# Altium PCB 集成晶闸管.PcbDoc
Units mil, origin at the board's own origin, x right, y up, seen from the top; angles counter-clockwise.
Board outline 5905.51 x 7086.61 mil, 4 copper layers (Top Layer, Internal Plane 1, Internal Plane 2, Bottom Layer); 20 components, 19 nets, 84 pads, 0 vias.
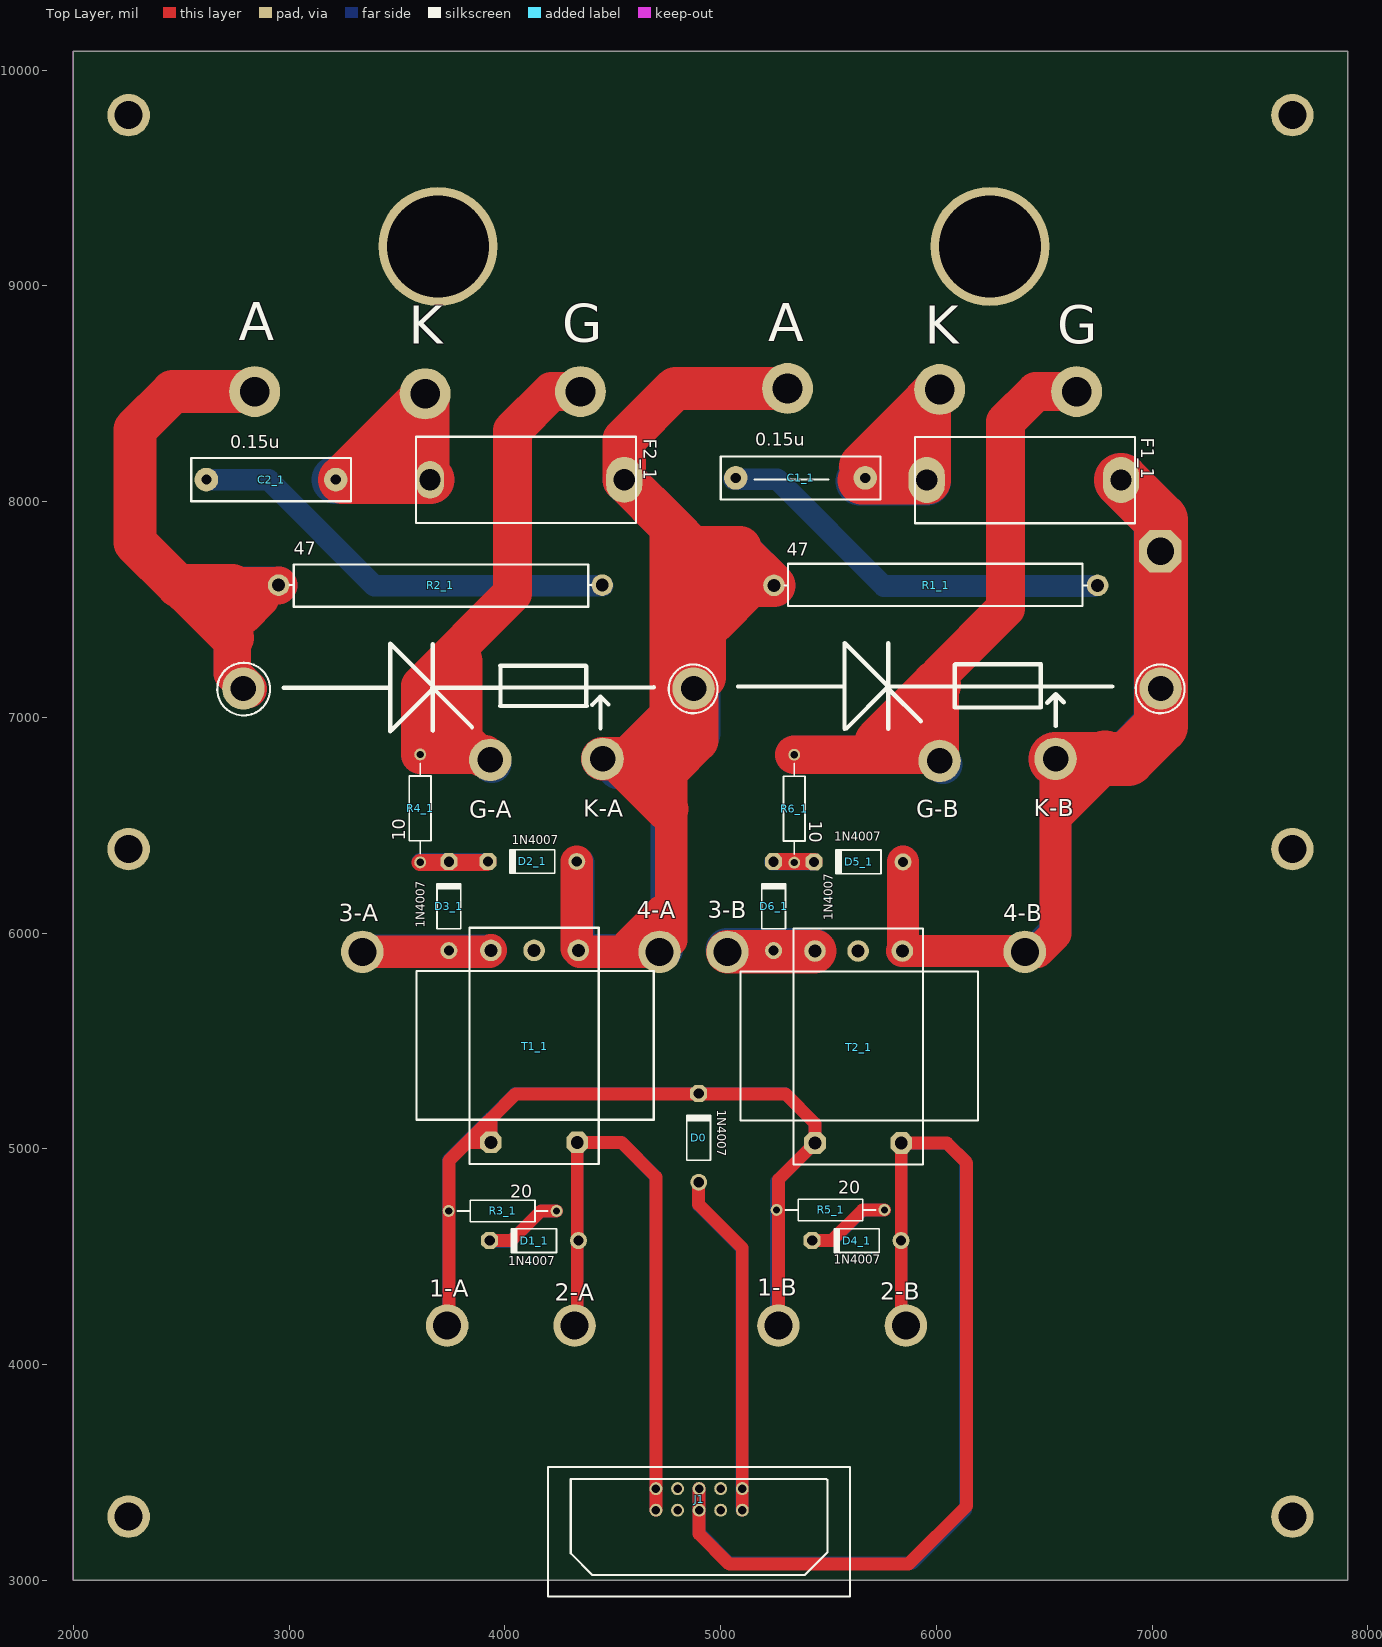
[diagram p0: Top Layer view]
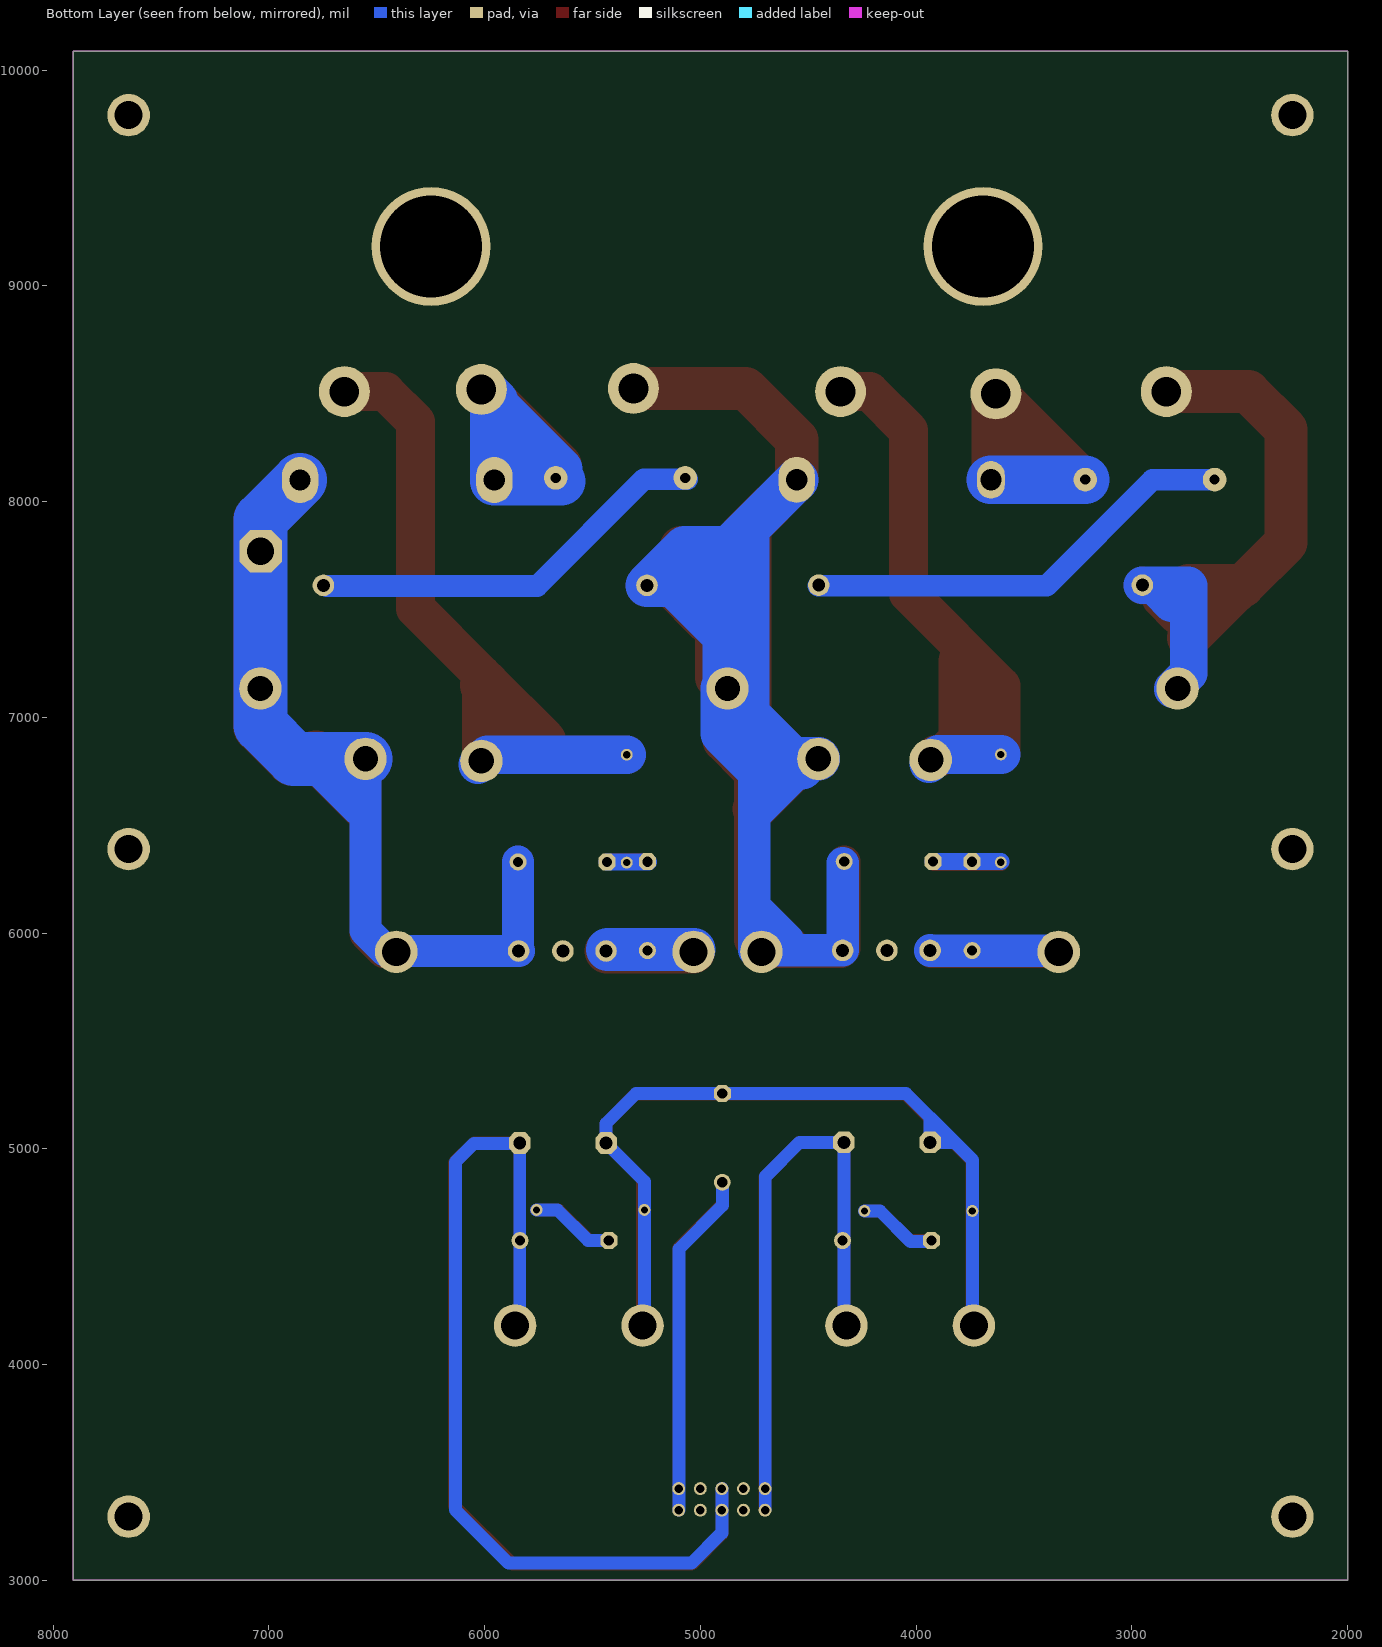
[diagram p1: Bottom Layer view, seen from below]
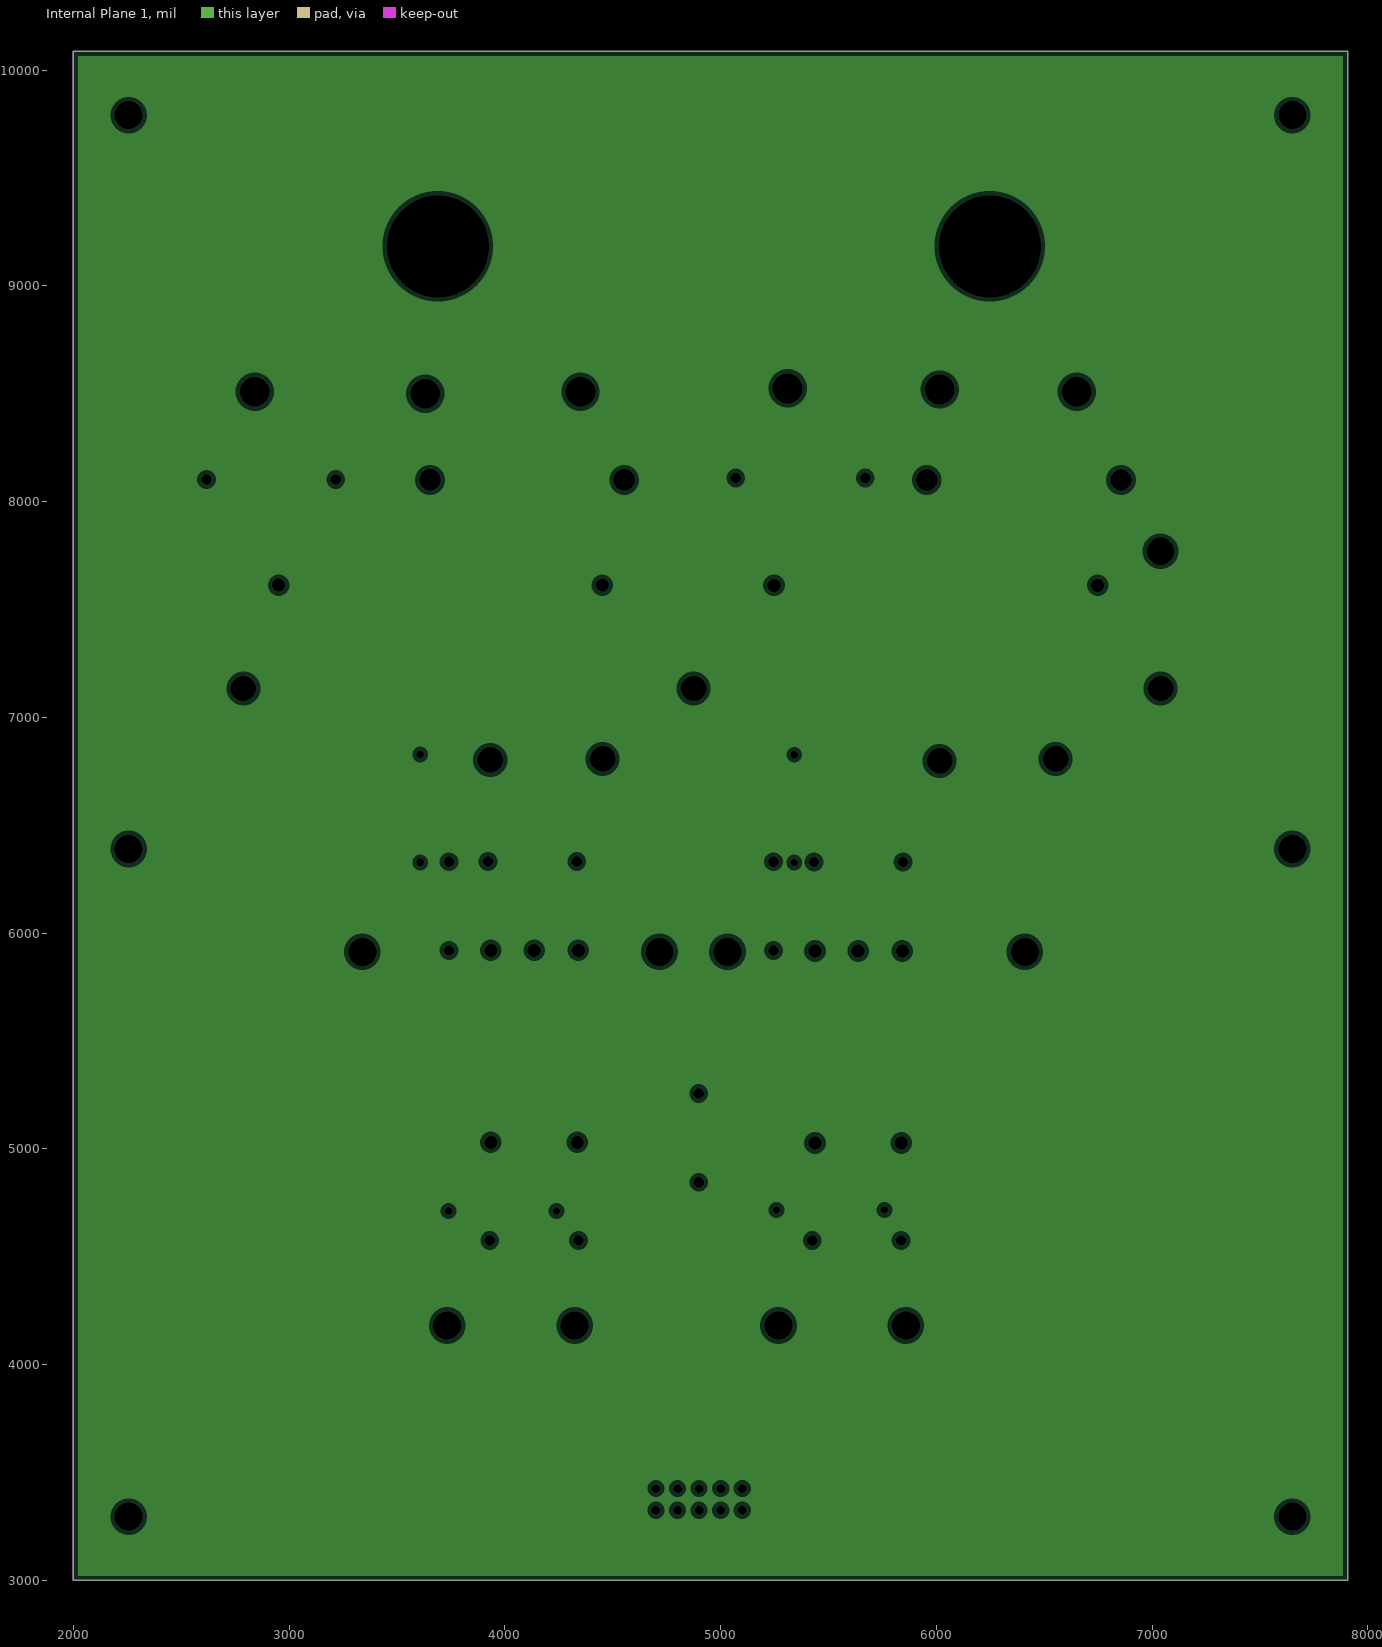
[diagram p2: Internal Plane 1, clearances drawn from the general rule]
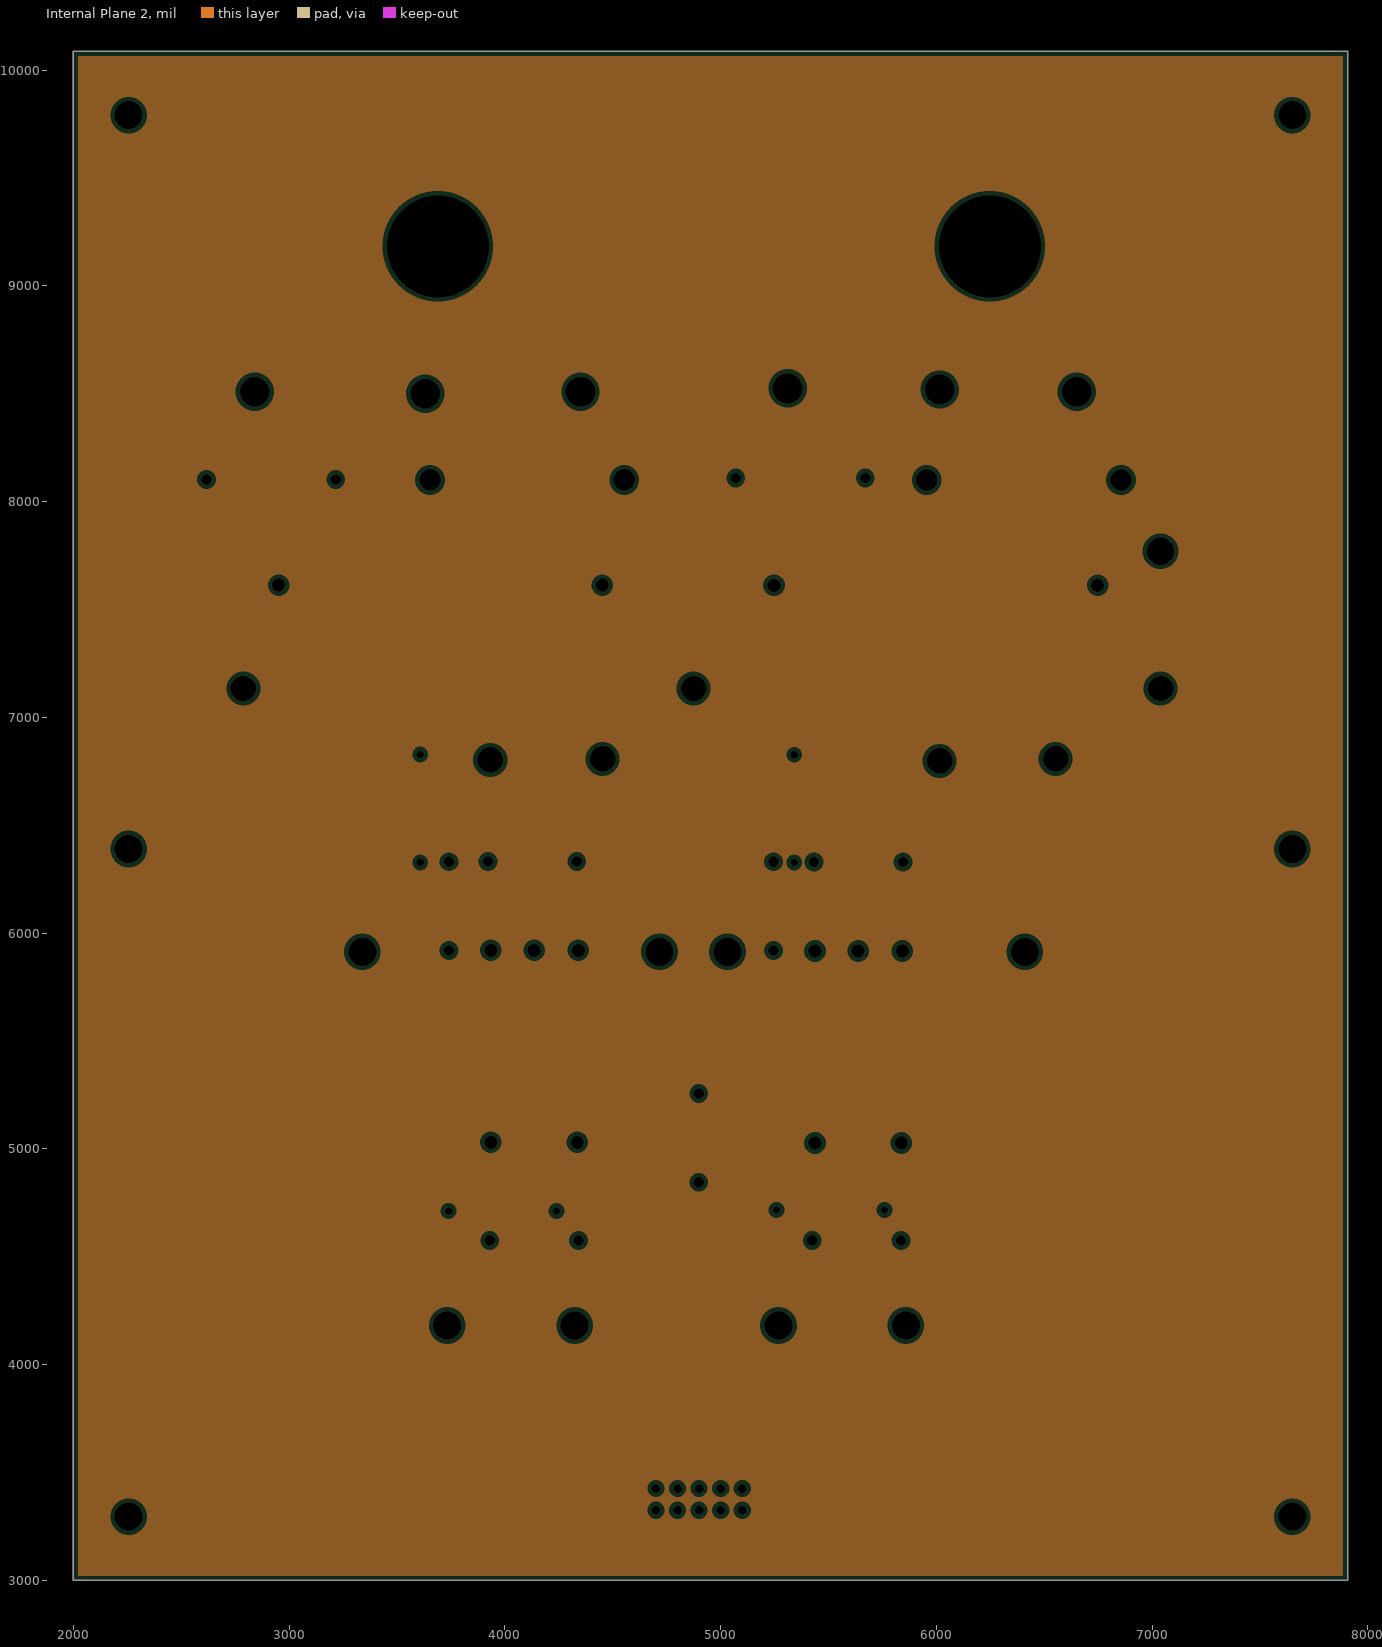
[diagram p3: Internal Plane 2, clearances drawn from the general rule]

## Layer stack, top to bottom
Top Layer: signal copper 1.4
Dielectric: dielectric 12.6, FR-4, Dk 4.8
Internal Plane 1: plane copper 1.4
Dielectric: dielectric 12.6, FR-4, Dk 4.8
Internal Plane 2: plane copper 1.4
Dielectric: dielectric 12.6, FR-4, Dk 4.8
Bottom Layer: signal copper 1.4

## Board outline
2000,3000 7905.51,3000 7905.51,10086.61 2000,10086.61

## Design rules (kind name [scope] priority, off if disabled: settings)
Clearance Clearance_1 [All] p1: gap=10
Clearance [All] p2: gap=7.87
PlaneClearance [All] p1: clearance=20
PlaneConnect [All] p1: planeconnectstyle=Relief reliefexpansion=20 reliefentries=4 reliefconductorwidth=10 reliefairgap=10
PolygonConnect [All] p1: connectstyle=Relief reliefconductorwidth=10 reliefentries=4 polygonreliefangle="90 Angle" airgapwidth=10
RoutingVias [All] p1: holewidth=23.62 width=39.37 viastyle="Through Hole" minholewidth=28 minwidth=50 maxholewidth=28 maxwidth=50
SolderMaskExpansion [All] p1: expansion=4
Width [All] p1: maxlimit=300 minlimit=10 preferedwidth=100 minimp=50.000000 maximp=50.000000 favimp=50.000000
26 further rules are at their usual default settings.

## Components (designator, comment, footprint, x,y, rotation, side; value= is the part's Value field where it differs from the comment)
C1_1 "0.15u" CAP_K 5670,8110 r180 top
C2_1 "0.15u" CAP_K 3216,8102 r180 top
D0 "1N4007" DO-41 4898,5051 r90 top
D1_1 "1N4007" DO-41 4135,4575 r180 top
D2_1 "1N4007" DO-41 4127,6332 r180 top
D3_1 "1N4007" DO-41 3740,6125 r90 top
D4_1 "1N4007" DO-41 5630,4575 r180 top
D5_1 "1N4007" DO-41 5639,6330 r180 top
D6_1 "1N4007" DO-41 5245,6125 r90 top
F1_1 "380V/15A" FUSE#1 6555,8200 r180 top
F2_1 "380V/15A" FUSE#2 3953,8001 r0 top
J1 "CON" PLC_IN 5100,3425 r90 top
R1_1 "47" RES_K 6747,7612 r180 top
R2_1 "47" RES_K 2951,7613 r0 top
R3_1 "20" AXIAL-0.5 3989,4712 r180 top
R4_1 "10" AXIAL-0.5 3607,6578 r270 top
R5_1 "20" AXIAL-0.5 5509,4717 r180 top
R6_1 "10" AXIAL-0.5 5341,6577 r270 top
T1_1 "P_trans" P_TRANS 3935,5030 r90 top
T2_1 "P_trans" P_TRANS 5437,5027 r90 top

## Footprints (in the part's own frame and the unit in brackets; to place one, negate y for a bottom-side part, rotate by r counter-clockwise, add the part's x,y. Pads: shape width x height; smd on the part's side, far side on the other; paste and mask are expansions set on the pad)
AXIAL-0.5 [mm]
  round 1.4 hole 0.85: 1(-6.35,0) 2(6.35,0)
  silkscreen extent -5.33,-1.27 5.33,1.27
CAP_K [mm]
  round 2.778 hole 1.2: 1(0,0) 2(15.24,0)
  silkscreen extent -1.78,-2.54 17.02,2.54
DO-41 [mm]
  round 2 hole 1.2: 1(-5.23,0)
  oct 2x2 hole 1.2: 2(5.23,0)
  silkscreen extent -2.65,-1.41 2.75,1.4
FUSE#1 [mm]
  oval 4.27x5.413 hole 2.5: 1(-7.62,2.54) 2(15.24,2.54)
  silkscreen extent -9.27,-2.54 16.64,7.62
FUSE#2 [mm]
  oval 3.27x4.413 hole 2.5: 1(-7.62,2.54)
  oval 4.27x5.413 hole 2.5: 2(15.24,2.54)
  silkscreen extent -9.27,-2.54 16.64,7.62
P_TRANS [mil]
  oct 100x100 hole 60: 1(0,0) 2(0,-400)
  round 100 hole 60: 3(890,0) 4(890,-405) ""(890,-200)
  silkscreen extent -100,-755 995,345
PLC_IN [mil]
  round 60 hole 39.37: 1(0,0) 2(-100,0) 3(0,100) 4(-100,100) 5(0,200) 6(-100,200) 7(0,300) 8(-100,300) 9(0,400) 10(-100,400)
  silkscreen extent -500,-500 100,900
RES_K [mil]
  round 100 hole 60: 1(0,0) 2(1500,0)
  silkscreen extent 50,-100 1450,95

## Free pads (board coordinates)
  round 196.85 hole 129.92: 0(2255.91,6389.76) 0(7649.61,3295.28) 1(2255.91,3295.28) 1(7649.61,6389.76) 2(2255.91,9791.34) 2(3732.28,4181.1) 3(4322.83,4181.1) 3(7649.61,9791.34) 4(5267.72,4181.1) 5(5858.27,4181.1) 6(3338.58,5913.39) 7(4716.54,5913.39) 8(5031.5,5913.39) 9(6409.45,5913.39)
  round 236.22 hole 137.8: 0(2840,8510) 1(3630,8500) 2(4350,8510) 3(5310,8525) 4(6015,8520) 5(6650,8510)
  round 196.85 hole 118.11: 0(4453,6808) 1(3932,6803) 2(6015,6798) 3(6552,6808) ""(2787.4,7133.86) ""(4874.02,7133.86) ""(7039.37,7133.86)
  oct 196.85x196.85 hole 125.98: 0(7038,7770)
  round 551.18 hole 472.44: ""(3688.9,9183.23) ""(6247.95,9183.23)

## Nets (pads, with @x,y where several pads share a name; then routed paths per layer and width w, separated by ;. In a path a pad name is that pad's centre, name@x,y a point inside that pad or via, vN(x,y) a via of type N, cw(c..) or ccw(c..) an arc to the next point about the centre after c; other vN are vias at no path point)
CP1: D1_1.1 J1.9 J1.10 pad.3@4322.83,4181.1 T1_1.2 | length 5626.1
  Top Layer w60: pad.3@4322.83,4181.1 4335,4193.27 T1_1.2 4540,5030 4700,4870 J1.9 J1.10
  Bottom Layer w60: pad.3@4335,4205 T1_1.2 4540,5030 4699,4871 J1.10@4699,3330
CP2: D4_1.1 J1.5 J1.6 pad.5@5858.27,4181.1 T2_1.2 | length 8812.3
  Top Layer w60: J1.5 J1.6 4900,3215 5040,3075 5870,3075 6140,3345 6140,4935 6048,5027 T2_1.2 5837,4202.37 pad.5@5858.27,4181.1
  Bottom Layer w60: J1.5 J1.6 4900,3220 5040,3080 5890,3080 6135,3325 6135,4940 6050,5025 T2_1.2@5837,5025 ; T2_1.2@5835,5025 T2_1.2@5837,5025 ; pad.5@5837,4170 T2_1.2@5837,5025 ; T2_1.2 T2_1.2@5837,5025
NetC1_1: C1_1.2 R1_1.1 | length 1875.6
  Bottom Layer w100: C1_1.2@5060,8103 5262,8103 5756,7609 R1_1.1@6731,7609
NetC1_2: C1_1.1 F1_1.2 pad.4@6015,8520 | length 2445.7
  Top Layer w225: C1_1.1@5655,8100 F1_1.2 5955,8460 pad.4@6015,8520 ; 5660,8165 pad.4@5980,8485
  Bottom Layer w200: C1_1.1@5645,8095 5645,8150 pad.4@5955,8460
  Bottom Layer w225: C1_1.1@5645,8095 F1_1.2@5955,8095 ; F1_1.2 5955,8460 pad.4@6015,8520
NetC2_1: C2_1.2 R2_1.2 | length 2040.8
  Bottom Layer w78.74: C2_1.2 C2_1.2@2617,8101
  Bottom Layer w100: C2_1.2@2617,8101 2904,8101 3395,7610 R2_1.2@4453,7610
NetC2_2: C2_1.1 F2_1.1 pad.1@3630,8500 | length 1777.6
  Top Layer w225: F2_1.1 F2_1.1@3652,8102 ; F2_1.1@3652,8102 3247,8102 3630,8485 3630,8124 F2_1.1@3652,8102
  Bottom Layer w225: C2_1.1 3652,8102 F2_1.1
NetD1_1: D6_1.1 pad.8 T2_1.3 | length 806.9
  Top Layer w200: pad.8 5433.39,5913.39 T2_1.3
  Bottom Layer w200: pad.8@5030,5924.09 T2_1.3@5429.91,5924.09
NetD1_2: D5_1.2 D6_1.2 R6_1.2 | length 379.3
  Top Layer w78.74: D6_1.2 D5_1.2@5432.19,6330.91
  Bottom Layer w78.74: D6_1.2@5241,6330 D5_1.2
NetD2_1: D5_1.1 F1_1.1 pad.0@7038,7770 pad.3@6552,6808 pad.9 pad.@7039.37,7133.86 T2_1.4 | length 8046.6
  Top Layer w150: T2_1.4 6405.83,5917 pad.9 6468.39,5913.39 6552,5997 6552,6808 pad.3@6552,6815 ; T2_1.4@5844.91,5919.91 D5_1.1 ; 6575,6560 6820,6805
  Top Layer w250: pad.3@6552,6808 6888,6808 7040,6960 7040,7915 F1_1.1 ; 6782,6807 6782,6815
  Bottom Layer w150: D5_1.1 5844.91,5919.91 T2_1.4 6405.83,5917 pad.9 ; pad.9@6409.45,5917 6457,5917 6552,6012 pad.3@6552,6808
  Bottom Layer w180: 6580,6590 6740,6750
  Bottom Layer w250: pad.3@6552,6808 6883,6808 7038,6963 7038,7770 7038,7917 F1_1.1
NetD3_1: D3_1.1 pad.6 T1_1.3 | length 1199.5
  Top Layer w150: pad.6 3928.39,5913.39 T1_1.3
  Bottom Layer w150: pad.6@3335,5919.09 D3_1.1 3934.09,5919.09 T1_1.3
NetD3_2: D2_1.2 D3_1.2 R4_1.2 | length 629.8
  Top Layer w78.74: R4_1.2 3917.09,6328 D2_1.2
  Bottom Layer w78.74: R4_1.2@3607,6332 D2_1.2
NetD4_1: D2_1.1 F2_1.2 pad.0@4453,6808 pad.3@5310,8525 pad.7 pad.@4874.02,7133.86 R1_1.2 T1_1.4 | length 13704.7
  Top Layer w150: D2_1.1 4332.91,5927.09 T1_1.4 4346.61,5913.39 pad.7 4770,5966.85 4770,6775 ; 4570,5945 4725,6100
  Top Layer w200: pad.0@4453,6808 4572,6808 4769.5,7005.5 ; 4560,6765 4750,6575 ; 4770,6775 4889,6894 4889,7125 4769.5,7005.5 ; pad.@4925,7185 4925,7735 ; 4965,7440 5137,7612 R1_1.2 5089,7770 5089,7786 4868,7786 4769.5,7884.5 ; 5025,7695 5070,7650 ; pad.3@5310,8525 4790,8525 4553,8288 F2_1.2 4769.5,7884.5 ; 4769.5,7005.5 4769.5,7884.5
  Bottom Layer w150: D2_1.1@4340,6324.91 T1_1.4 4750,5920 4750,6985 ; pad.0@4529.5,6765.5 4742.5,6552.5 ; 4595,5970 4735,6110 ; 4695,6750 4695,6825 ; 4754,6779 4754,6990 4754,7825 4829,7825
  Bottom Layer w175: 4902.5,7372.5 5142,7612
  Bottom Layer w200: pad.0@4453,6808 4572,6808 ; pad.0@4529.5,6765.5 4572,6808 ; F2_1.2 4829,7825 4868,7786 ; 4754,6779 4900,6925 4900,7136 pad.@4889,7125 ; 4901,7694 4980,7615 ; 5142,7612 R1_1.2 5073,7786 4889,7786 ; 4572,6808 4754,6990 pad.@4889,7125 ; 4868,7786 4889,7765 ; 4868,7786 4889,7786 ; pad.@4889,7125 4889,7765 ; 4889,7765 4889,7786
NetD5_2: D4_1.2 R5_1.1 | length 787
  Top Layer w60: D4_1.2 5515,4575 5657,4717 R5_1.1
  Bottom Layer w60: D4_1.2@5424.09,4576 5521,4576 5662,4717 R5_1.1
NetD6_2: D1_1.2 R3_1.1 | length 733.1
  Top Layer w60: D1_1.2 4030,4575 4167,4712 R3_1.1
  Bottom Layer w60: D1_1.2@3936.59,4582.5 3949.09,4570 4025,4570 4167,4712 R3_1.1
NetQ1_2: pad.2@6015,6798 pad.5@6650,8510 R6_1.1 | length 3815.4
  Top Layer w180: R6_1.1 5986,6827 6015,6798 6015,7200 6320,7505 6320,8370 6460,8510 pad.5@6650,8510
  Top Layer w230: 5735,6885 6000,7150
  Bottom Layer w180: R6_1.1 pad.2@5986,6827 ; pad.2@6015,6798 pad.2@6031.5,6781.5
NetQ2_1: pad.0@2840,8510 pad.@2787.4,7133.86 R2_1.1 | length 3392.8
  Top Layer w175: 2736,7369 2736,7205 pad.@2810,7131 ; 2736,7610 2948,7610 R2_1.1 ; 2785,7470 2865,7550
  Top Layer w200: 2520,7585 2736,7369 ; 2736,7610 2485,7610 2285,7810 2285,8335 2460,8510 pad.0@2840,8510
  Bottom Layer w175: pad.@2810,7131 2736,7205 2736,7610 2739,7613 R2_1.1 ; 2815.5,7530.5 2870,7585
NetQ2_2: pad.1@3932,6803 pad.2@4350,8510 R4_1.1 | length 3203.1
  Top Layer w180: 3780,6925 pad.1@3890,6815 ; pad.1@3932,6803 3907,6828 R4_1.1 3607,7147 4035,7575 4035,8330 4215,8510 pad.2@4350,8510
  Top Layer w230: 3780,6925 3780,7260
  Bottom Layer w180: R4_1.1 pad.1@3897,6828 ; pad.1@3927,6798 pad.1@3940,6785
V-SS: D0.2 pad.2@3732.28,4181.1 pad.4@5267.72,4181.1 R3_1.2 R5_1.2 T1_1.1 T2_1.1 | length 7794
  Top Layer w60: pad.2@3732.28,4181.1 3740,4188.82 3740,4945 3825,5030 ; 3925,5130 3825,5030 ; pad.4@5267.72,4181.1 5267.72,4857.72 T2_1.1 5437,5118 5300,5255 4050,5255 3935,5140 T1_1.1 3825,5030
  Bottom Layer w60: pad.2@3740,4160 3739,4161 R3_1.2 3739,4949 3820,5030 T1_1.1 3935,5145 4046.91,5256.91 D0.2 5298.09,5256.91 5437,5118 T2_1.1 5259,4849 R5_1.2 pad.4@5259,4180 ; 3802.5,5012.5 3930,5140
VSS: D0.1 J1.1 J1.2 | length 3207.5
  Top Layer w60: D0.1 4898,4742 5100,4540 J1.1 J1.2
  Bottom Layer w60: D0.1 4898,4737 5099,4536 5099,3326 J1.2
pads on no net: J1.3 J1.4 J1.7 J1.8 T1_1. T2_1.

## Polygon pours and split planes (outlines as drawn)
no net on Internal Plane 1 (split plane): 7885.41,3020.1 2020.1,3020.1 2020.1,10066.52 7885.41,10066.52
no net on Internal Plane 2 (split plane): 7885.41,3020.1 2020.1,3020.1 2020.1,10066.52 7885.41,10066.52

## Keep-outs
Keep-Out Layer:
  the board outline again, w0

## Silkscreen, mask and mechanical layers (free items; w line width, h text height)
Top Overlay:
  lines w10: 2700,7215 ccw(c2788.71,7131.02) 2703.27,7218.33 ; 3666,6933 3666,7336 ; 3669,7133 3787,7015 ; 3971,7139 4583,7139 ; 3976,7050 4378,7050 4377,7051 4377,7217 ; 3979,7050 3979,7238 ; 4790,7210 ccw(c4872.32,7132.32) 4793.27,7213.33 ; 5156,8102 5499,8102 ; 6955,7210 ccw(c7037.32,7132.32) 6958.27,7213.33
  lines w20: 2975,7138 3468,7138 ; 3468,6936 3468,7336 ; 3469,7341 3666,7144 ; 3476,6943 3665,7132 ; 3663,7137 3968,7137 ; 3666,6939 3666,7339 ; 3680,7122 3847,6955 ; 3967,7137 4690,7140 ; 3978,7053 4379,7053 ; 3978,7240 4375,7240 ; 3979,7055 3979,7239 ; 4377,7053 4377,7236 ; 4404,7058 4441,7095 ; 4443,6950 4443,7090 ; 4443,7097 4480,7060 ; 5080,7143 5295,7143 ; 5289,7143 5572,7143 ; 5574,6948 5574,7342 ; 5575,7345 5777,7143 5583,6949 ; 5776,6948 5776,7344 ; 5777,7133 5928,6982 ; 5782,7143 6023,7143 ; 6012,7143 6154,7143 ; 6085,7244 6085,7046 6483,7046 6483,7232 ; 6088,7246 6485,7246 6485,7230 ; 6132,7143 6553,7143 ; 6514,7068 6551,7105 ; 6546,7143 6815,7143 ; 6553,6960 6553,7100 ; 6553,7107 6590,7070
  text "A" at 2765,8690 h300
  text "A" at 5220,8685 h300
  text "G" at 4265,8680 h300
  text "K" at 3555,8675 h300
  text "K" at 5945,8675 h300
  text "G" at 6560,8675 h300
  text "K-B" at 6451,6541 h80
  text "K-A" at 4362,6539 h79.92
  text "G-B" at 5906,6536 h80
  text "G-A" at 3835,6534 h80
  text "4-A" at 4610,6070 h78
  text "3-B" at 4940,6070 h78
  text "3-A" at 3230,6055 h78.74
  text "4-B" at 6310,6055 h78
  text "1-B" at 5170,4320 h78.74
  text "1-A" at 3650,4315 h78.74
  text "2-B" at 5740,4300 h78.74
  text "2-A" at 4230,4295 h78.74
Drill Drawing:
  text ".LEGEND" at 8105.51,3200 h60
  text "Drill Drawing." at 8105.51,3100 h60

## Dimensions
2000,3000 to 2000,10086.61 on Mechanical 1
2000,3000 to 7905.51,3000 on Mechanical 1